# Altium PCB PCB1.PcbDoc
Units mil, origin at the board's own origin, x right, y up, seen from the top; angles counter-clockwise.
Board outline 4645.67 x 2874.02 mil, 2 copper layers (Top Layer, Bottom Layer); 106 components, 94 nets, 355 pads, 301 vias.
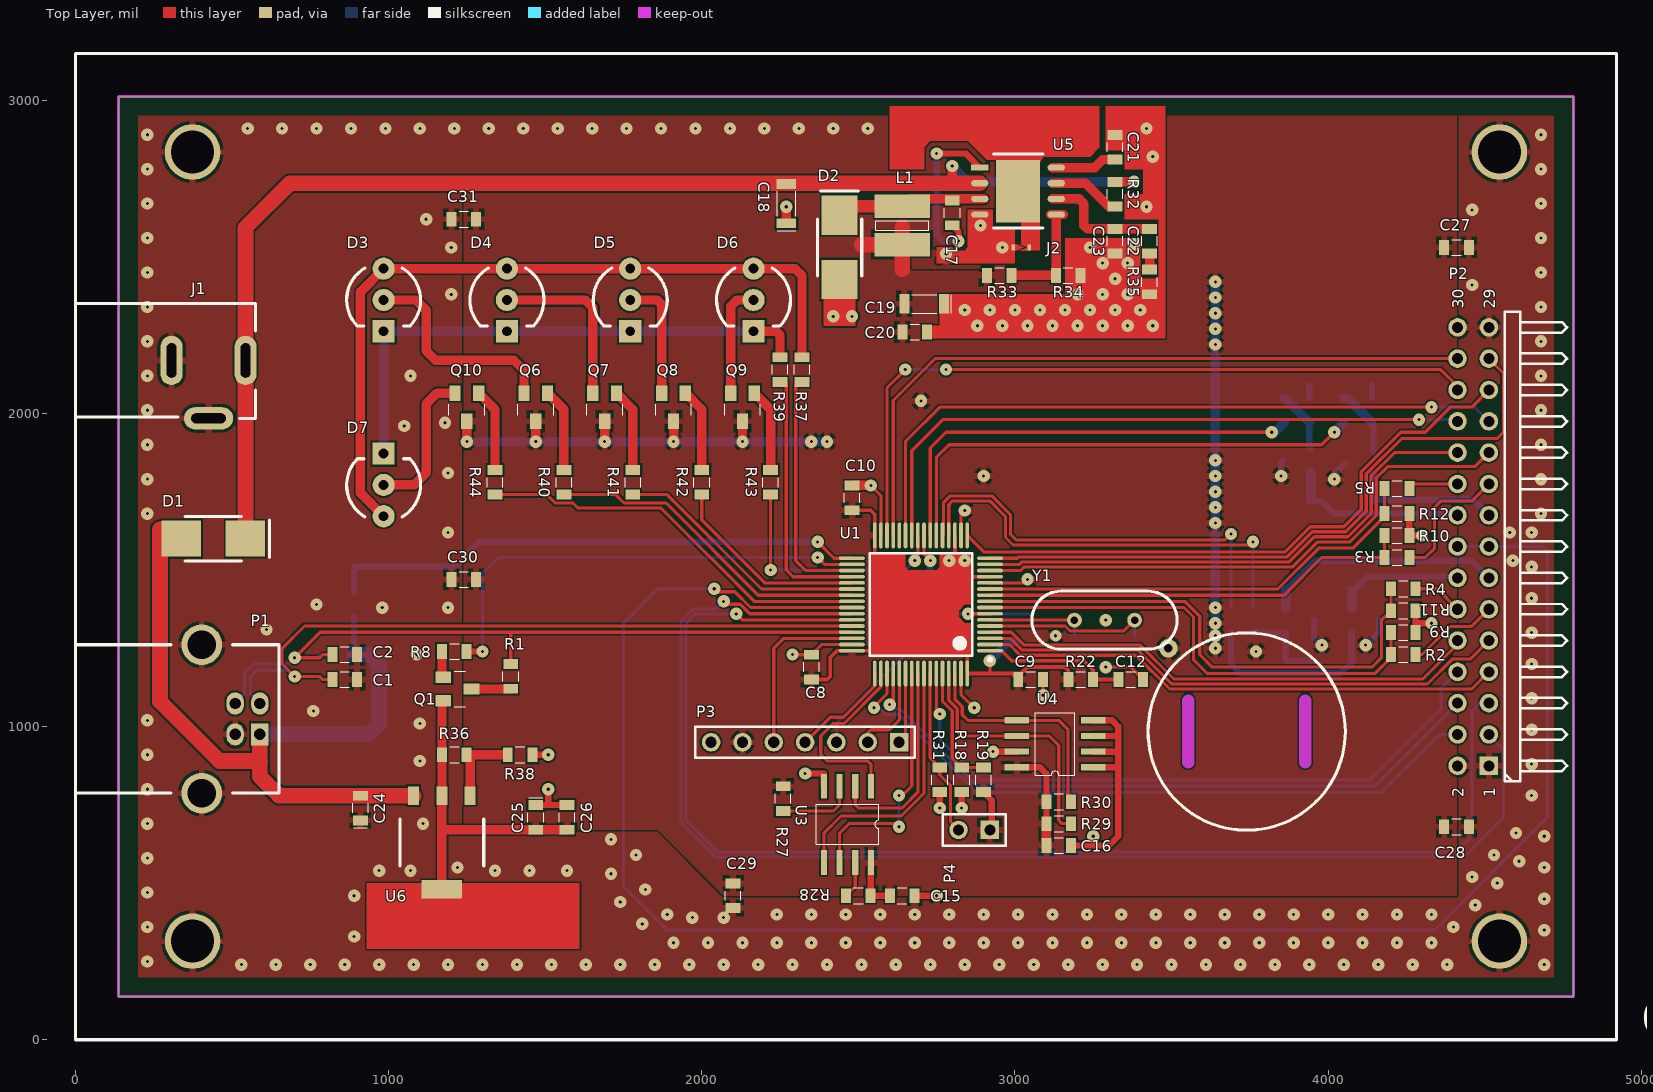
[diagram p0: Top Layer view]
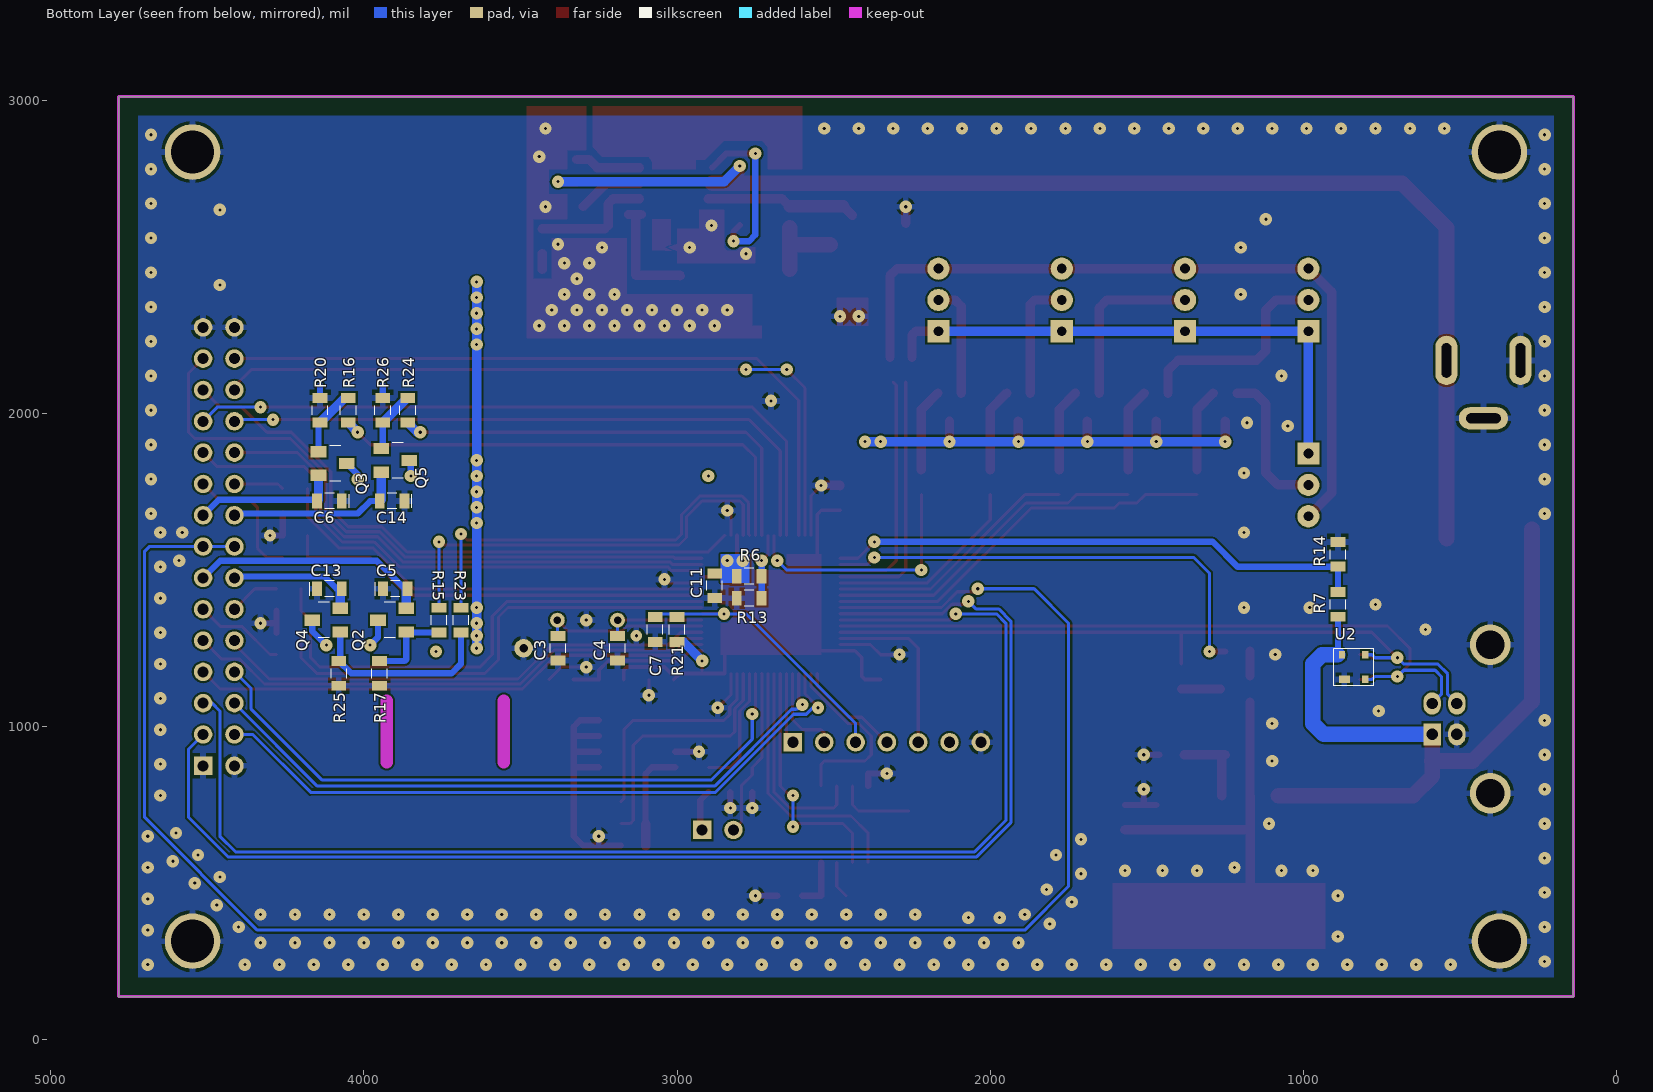
[diagram p1: Bottom Layer view, seen from below]

## Layer stack, top to bottom
Top Layer: signal copper 1.4
Dielectric: dielectric 12.6, FR-4, Dk 4.8
Bottom Layer: signal copper 1.4

## Board outline
137.8,137.8 4783.46,137.8 4783.46,3011.81 137.8,3011.81

## Design rules (kind name [scope] priority, off if disabled: settings)
Clearance [All] p1: gap=6
DiffPairsRouting DiffPair_DiffPairsRouting [InDifferentialPair ('USBD')] p1: maxlimit=10 minlimit=10 mostfreqgap=10 maxuncoupledlength=500
DiffPairsRouting [All] p2: maxlimit=10 minlimit=10 mostfreqgap=10 maxuncoupledlength=500
MatchedLengths DiffPair_MatchedLengths [InDifferentialPair ('USBD')] p1: tolerance=1000 checknetsindiffpair=TRUE checkdiffpairvsdiffpair=TRUE checkothers=TRUE
PlaneConnect [All] p1: planeconnectstyle=Relief reliefexpansion=20 reliefentries=4 reliefconductorwidth=20 reliefairgap=10
PolygonConnect [All] p1: connectstyle=Relief reliefconductorwidth=20 reliefentries=4 polygonreliefangle="90 Angle" airgapwidth=10
RoutingVias [All] p1: holewidth=28 width=50 viastyle="Through Hole" minholewidth=28 minwidth=50 maxholewidth=28 maxwidth=50
SolderMaskExpansion [All] p1: expansion=4
Width DiffPair_Width [InDifferentialPair('USBD')] p1: maxlimit=30 minlimit=6 preferedwidth=10
Width [All] p2: maxlimit=100 minlimit=6 preferedwidth=30
26 further rules are at their usual default settings.

## Classes and differential pairs
component class Sheet1: C1 C2 C3 C4 C5 C6 C7 C8 C9 C10 C11 C12 C13 C14 C15 C16 P1 P2 P3 P4 Q1 Q2 Q3 Q4 Q5 R1 R2 R3 R4 R5 R6 R7 R8 R9 R10 R11 R12 R13 R14 R15 R16 R17 R18 R19 R20 R21 R22 R23 R24 R25 R26 R27 R28 R29 R30 R31 U1 U2 U3 U4 Y1
component class Sheet2: C17 C18 C19 C20 C21 C22 C23 C24 C25 C26 C27 C28 C29 C30 C31 D1 D2 D3 D4 D5 D6 D7 J1 J2 L1 Q6 Q7 Q8 Q9 Q10 R32 R33 R34 R35 R36 R37 R38 R39 R40 R41 R42 R43 R44 U5 U6
differential pair USBD: +USBD_P -USBD_N

## Components (designator, comment, footprint, x,y, rotation, side; value= is the part's Value field where it differs from the comment)
C1 "Cap" 0805 860,1150 r180 top
C2 "Cap" 0805 860,1230 r180 top
C3 "Cap" 0805 3380,1250 r90 bottom
C4 "Cap" 0805 3190,1250 r270 bottom
C5 "Cap" 0805A 3900,1440 r0 bottom
C6 "Cap" 0805A 4110,1720 r180 bottom
C7 "Cap" 0805 3070,1310 r270 bottom
C8 "Cap" 0805 2350,1190 r270 top
C9 "Cap" 0805 3050,1150 r180 top
C10 "Cap" 0805 2480,1730 r270 top
C11 "Cap" 0805 2880,1450 r90 bottom
C12 "Cap" 0805 3370,1150 r180 top
C13 "Cap" 0805A 4110,1440 r0 bottom
C14 "Cap" 0805A 3910,1720 r180 bottom
C15 "Cap" 0805 2640,460 r180 top
C16 "CAP" 0805 3140,620 r180 top
C17 "Cap" 0805 2800,2640 r90 top
C18 "Cap" 1206A 2270,2670 r270 top
C19 "Cap" 1206A 2710,2350 r0 top
C20 "Cap" 0805 2680,2260 r180 top
C21 "Cap" 0805 3320,2850 r270 top
C22 "Cap" 0805 3430,2550 r90 top
C23 "Cap" 0805 3320,2550 r90 top
C24 "Cap" 0805A 910,740 r270 top
C25 "Cap" 0805A 1470,710 r90 top
C26 "Cap" 0805 1570,710 r270 top
C27 "Cap" 0805 4410,2530 r180 top
C28 "Cap" 0805 4410,680 r180 top
C29 "Cap" 0805 2100,460 r90 top
C30 "Cap" 0805 1240,1470 r0 top
C31 "Cap" 0805 1240,2620 r0 top
D1 "optional" SMA_DO-241AC 440,1600 r0 top
D2 "B130" SMA_DO-241AC 2440,2530 r90 top
D3 "LED" LED-D 984.25,2362.2 r90 top locked
D4 "LED" LED-D 1377.95,2362.2 r90 top locked
D5 "LED" LED-D 1771.65,2362.2 r90 top locked
D6 "LED" LED-D 2165.35,2362.2 r90 top locked
D7 "LED" LED-D 984.25,1771.65 r270 top locked
J1 "PowerSocket" SP_PWR 0,1988.19 r0 top locked
J2 "Jump" SP_JUMP 3020,2530 r0 top
L1 "Inductance" GD4520/4532 2640,2600 r270 top
P1 "USB" USB_B_FE 0,787.4 r0 top locked
P2 "Header 15X2H" HDR2X15H 4513.39,874.8 r90 top locked
P3 "Header 7" HDR1X7 2630,950 r180 top
P4 "Header 2" HDR1X2 2920,670 r180 top
Q1 "S8550" SOT-23 1220,1120 r270 top
Q2 "N-MOS" SOT-23 3910,1340 r90 bottom
Q3 "N-MOS" SOT-23 4100,1840 r270 bottom
Q4 "N-MOS" SOT-23 4120,1340 r90 bottom
Q5 "N-MOS" SOT-23 3900,1850 r270 bottom
Q6 "S8050" SOT-23 1470,2020 r180 top
Q7 "S8050" SOT-23 1690,2020 r180 top
Q8 "S8050" SOT-23 1910,2020 r180 top
Q9 "S8050" SOT-23 2130,2020 r180 top
Q10 "S8050" SOT-23 1250,2020 r180 top
R1 "Res" 0805 1390,1160 r90 top
R2 "Res" 0805 4240,1230 r0 top
R3 "Res" 0805 4220,1540 r0 top
R4 "Res" 0805 4240,1440 r0 top
R5 "Res" 0805 4220,1760 r0 top
R6 "Res" 0805 2770,1480 r0 bottom
R7 "Res" 0805 890,1390 r270 bottom
R8 "Res" 0805 1210,1240 r0 top
R9 "Res" 0805 4240,1300 r180 top
R10 "Res" 0805 4220,1610 r180 top
R11 "Res" 0805 4240,1370 r180 top
R12 "Res" 0805 4220,1680 r180 top
R13 "Res" 0805 2770,1410 r180 bottom
R14 "Res" 0805 890,1550 r270 bottom
R15 "Res" 0805 3760,1340 r270 bottom
R16 "Res" 0805 4050,2010 r270 bottom
R17 "Res" 0805 3950,1170 r90 bottom
R18 "Res" 0805 2830,830 r90 top
R19 "Res" 0805 2900,830 r270 top
R20 "Res" 0805 4140,2010 r90 bottom
R21 "Res" 0805 3000,1310 r90 bottom
R22 "Res" 0805 3210,1150 r0 top
R23 "Res" 0805 3690,1340 r270 bottom
R24 "Res" 0805 3860,2010 r270 bottom
R25 "Res" 0805 4080,1170 r90 bottom
R26 "Res" 0805 3940,2010 r90 bottom
R27 "Res" 0805 2260,770 r90 top
R28 "Res" 0805 2500,460 r0 top
R29 "Res" 0805 3140,690 r180 top
R30 "Res" 0805 3140,760 r180 top
R31 "Res" 0805 2760,830 r90 top
R32 "Res" 0805 3320,2700 r90 top
R33 "Res" 0805 2950,2440 r180 top
R34 "Res" 0805 3170,2440 r180 top
R35 "Res" 0805 3430,2420 r90 top
R36 "Res" 0805 1210,910 r180 top
R37 "Res" 0805 2320,2140 r90 top
R38 "Res" 0805 1420,910 r180 top
R39 "Res" 0805 2250,2140 r90 top
R40 "Res" 0805 1560,1780 r270 top
R41 "Res" 0805 1780,1780 r270 top
R42 "Res" 0805 2000,1780 r270 top
R43 "Res" 0805 2220,1780 r270 top
R44 "Res" 0805 1340,1780 r90 top
U1 "STM32F103RBT6" LQFP64_M 2700,1390 r180 top
U2 "PRTR5V0U2X" SOT143B 840,1190 r180 bottom
U3 "MX25L3205D" SOP-8 2540,810 r270 top
U4 "AT24Cxx" SOP-8 3250,870 r180 top
U5 "MP2307" SOIC8N 3010,2710 r0 top
U6 "ASM1117" SOT-223 1170,630 r180 top
Y1 "XTAL2" SP_XTAL 3190,1340 r0 top

## Footprints (in the part's own frame and the unit in brackets; to place one, negate y for a bottom-side part, rotate by r counter-clockwise, add the part's x,y. Pads: shape width x height; smd on the part's side, far side on the other; paste and mask are expansions set on the pad)
0805 [mm]
  rect 0.8x1.2 smd: 1(-1,0) 2(1,0)
  silkscreen extent -0.38,-0.64 0.38,0.64
0805A [mm]
  rect 0.8x1.2 smd: 1(-1,0) 2(1,0)
  silkscreen extent -0.38,-0.64 1.6,0.64
1206A [mm]
  rect 0.8x1.6 smd: 1(-1.6,0) 2(1.6,0)
  silkscreen extent -1.02,-0.75 2.2,0.75
GD4520/4532 [mm]
  rect 1.9x4.5 smd: 1(-1.55,0) 2(1.55,0)
  silkscreen extent -0.38,-2.16 0.38,2.16
HDR1X2 [mm] "Connector; Header; 2 Position"
  rect 1.5x1.5 hole 0.9: 1(0,0)
  round 1.5 hole 0.9: 2(2.54,0)
  silkscreen extent -1.27,-1.27 3.81,1.27
HDR1X7 [mm] "Connector; Header; 7 Position"
  rect 1.5x1.5 hole 0.9: 1(0,0)
  round 1.5 hole 0.9: 2(2.54,0) 3(5.08,0) 4(7.62,0) 5(10.16,0) 6(12.7,0) 7(15.24,0)
  silkscreen extent -1.27,-1.27 16.51,1.27
HDR2X15H [mm] "Connector; Header; 15x2 Position; Right Angle"
  rect 1.5x1.5 hole 0.9: 1(0,0)
  round 1.5 hole 0.9: 2(0,2.54) 3(2.54,0) 4(2.54,2.54) 5(5.08,0) 6(5.08,2.54) 7(7.62,0) 8(7.62,2.54) 9(10.16,0) 10(10.16,2.54) 11(12.7,0) 12(12.7,2.54) 13(15.24,0) 14(15.24,2.54) 15(17.78,0) 16(17.78,2.54) 17(20.32,0) 18(20.32,2.54) 19(22.86,0) 20(22.86,2.54) 21(25.4,0) 22(25.4,2.54) 23(27.94,0) 24(27.94,2.54) 25(30.48,0) 26(30.48,2.54) 27(33.02,0) 28(33.02,2.54) 29(35.56,0) 30(35.56,2.54)
  silkscreen extent -1.27,-6.35 36.83,-1.27
LED-D [mm]
  rect 1.8x1.8 hole 0.8: 1(-2.54,0)
  round 1.8 hole 0.8: 2(0,0) 3(2.54,0)
  silkscreen extent -2.12,-3 2.6,3
LQFP64_M [mm] "Thin QFP, 64-Leads, Body 10x10mm, Pitch 0.5mm, IPC Low Density"
  oval 2.1x0.3 smd: 1(-5.6,3.75) 2(-5.6,3.25) 3(-5.6,2.75) 4(-5.6,2.25) 5(-5.6,1.75) 6(-5.6,1.25) 7(-5.6,0.75) 8(-5.6,0.25) 9(-5.6,-0.25) 10(-5.6,-0.75) 11(-5.6,-1.25) 12(-5.6,-1.75) 13(-5.6,-2.25) 14(-5.6,-2.75) 15(-5.6,-3.25) 16(-5.6,-3.75) 33(5.6,-3.75) 34(5.6,-3.25) 35(5.6,-2.75) 36(5.6,-2.25) 37(5.6,-1.75) 38(5.6,-1.25) 39(5.6,-0.75) 40(5.6,-0.25) 41(5.6,0.25) 42(5.6,0.75) 43(5.6,1.25) 44(5.6,1.75) 45(5.6,2.25) 46(5.6,2.75) 47(5.6,3.25) 48(5.6,3.75)
  oval 0.3x2.1 smd: 17(-3.75,-5.6) 18(-3.25,-5.6) 19(-2.75,-5.6) 20(-2.25,-5.6) 21(-1.75,-5.6) 22(-1.25,-5.6) 23(-0.75,-5.6) 24(-0.25,-5.6) 25(0.25,-5.6) 26(0.75,-5.6) 27(1.25,-5.6) 28(1.75,-5.6) 29(2.25,-5.6) 30(2.75,-5.6) 31(3.25,-5.6) 32(3.75,-5.6) 49(3.75,5.6) 50(3.25,5.6) 51(2.75,5.6) 52(2.25,5.6) 53(1.75,5.6) 54(1.25,5.6) 55(0.75,5.6) 56(0.25,5.6) 57(-0.25,5.6) 58(-0.75,5.6) 59(-1.25,5.6) 60(-1.75,5.6) 61(-2.25,5.6) 62(-2.75,5.6) 63(-3.25,5.6) 64(-3.75,5.6)
  silkscreen extent -5.72,-4.15 4.15,4.57, body extent -5,-5 5,5, height 1.6
SMA_DO-241AC [mm]
  rect 3.2x2.92 smd: 1(-2.6,0) 2(2.6,0)
  silkscreen extent -2.3,-1.8 4.57,1.8
SOIC8N [mm]
  rect 1.4x0.508 smd: 1(-3.1,1.905)
  oval 1.4x0.508 smd: 2(-3.1,0.635) 3(-3.1,-0.635) 4(-3.1,-1.905) 5(3.1,-1.905) 6(3.1,-0.635) 7(3.1,0.635) 8(3.1,1.905)
  rect 3.55x5.07 smd: 9(0,0)
  silkscreen extent -2,-3 2,3
SOP-8 [mm]
  rect 2x0.5 smd: 1(0,0) 2(0,-1.27) 3(0,-2.54) 4(0,-3.81) 5(6.2,-3.81) 6(6.2,-2.54) 7(6.2,-1.27) 8(6.2,0)
  silkscreen extent 1.48,-4.44 4.72,0.64
SOT143B [mm]
  rect 0.9x0.6 smd: 1(-0.75,-1)
  rect 0.5x0.6 smd: 2(0.95,-1) 3(0.95,1) 4(-0.95,1)
  silkscreen extent -1.63,-1.5 1.63,1.5
SOT-23 [mm]
  rect 0.915x1.27 smd: 1(-0.958,-1.14) 2(0.958,-1.14) 3(0,1.14)
  silkscreen extent -1.45,-0.25 1.45,0.65
SOT-223 [mm]
  rect 0.9x1.5 smd: 1(-2.3,-3.8) 2(0,-3.8) 3(2.3,-3.8)
  rect 3.3x1.5 smd: 4(0,3.8)
  silkscreen extent -3.4,-1.9 3.4,1.9
SP_JUMP [mm]
  rect 0.3x0.5 smd: 1(-0.65,0) 2(0.65,0)
  Top Layer region: -0.127,0.25 0.508,0.25 0.508,-0.25 -0.127,-0.25 0.508,0
  Top Layer region: -0.381,0.25 -0.508,0.25 -0.508,-0.25 -0.381,-0.25 0.254,0
SP_PWR [mm]
  oval 1.8x4 hole 0.8 slot 2.8 at 90 deg: 1(13.8,4.6) 2(7.8,4.6)
  oval 4x1.8 hole 0.8 slot 2.8 at 0 deg: 3(10.8,-0.1)
  silkscreen extent 0,-0.1 14.6,9.2
SP_XTAL [mm]
  round 1.2 hole 0.6: 1(0,0) 2(4.88,0)
  silkscreen extent -3.45,-2.35 8.33,2.35
USB_B_FE [mm] "USB Female B Type Socket"
  rect 1.4x1.8 hole 0.92: 1(14.96,4.77)
  oval 1.4x1.8 hole 0.92: 2(14.96,7.27) 3(12.96,7.27) 4(12.96,4.77)
  round 3.3 hole 2.3: 5(10.25,12.04) 6(10.25,0)
  silkscreen extent 0,0 16.5,12.04

## Part data
C5 C6 C13 C14 C18 C19 C24 C25: library part "Cap Pol"
C16: library part Cap
D1 D2: library part "Diode 2"
D3 D4 D5 D6 D7: library part LED2
J1: library part PWR, "Power Socket"
P1: library part "USB Socket"
P2: "Header, 15-Pin, Dual row, Right Angle"
P3: "Header, 7-Pin"
P4: "Header, 2-Pin"
U1: "STM32 ARM-based 32-bit MCU with 128 Kbytes Flash, 64-pin LQFP, Industrial Temperature"
U3: library part MX25L1605D/MX25L3205D/MX25L6405D

## Free pads (board coordinates)
  round 59.06 hole 27.56: 0(3490,1250)
  round 177.17 hole 137.8: 7(374.02,2834.65) 8(4547.24,2834.65) 9(374.02,314.96) 10(4547.24,314.96)

## Via types
v1: diameter 39.37, hole 10, Top Layer to Bottom Layer, 299 vias
v2: diameter 36, hole 10, Top Layer to Bottom Layer, 1 vias
v3: diameter 39.37, hole 10, Top Layer to Bottom Layer, tented top, 1 vias

## Nets (pads, with @x,y where several pads share a name; then routed paths per layer and width w, separated by ;. In a path a pad name is that pad's centre, name@x,y a point inside that pad or via, vN(x,y) a via of type N, cw(c..) or ccw(c..) an arc to the next point about the centre after c; other vN are vias at no path point)
ADC_CH1: R2.1 R9.2 U1.8 | length 1548
  Top Layer w10: U1.8 3539.84,1380.16 3570,1350 3570,1213.37 3613.37,1170 4150.63,1170 4200.63,1220 R9.2
ADC_CH2: R3.1 R10.2 U1.10 | length 1380.1
  Top Layer w10: U1.10 3859.53,1419.53 3980,1540 R3.1 R10.2
ADC_CH3: R5.1 R12.2 U1.11 | length 1445
  Top Layer w10: U1.11 3839.21,1439.21 3970,1570 4079.26,1570 4180.63,1671.37 R12.2 R5.1
ADC_CH4: R4.1 R11.2 U1.9 | length 1653.4
  Top Layer w10: U1.9 3542.78,1399.84 3590,1352.63 3590,1230 3630,1190 4140,1190 4170,1220 4170,1339.37 R11.2 R4.1
ADC_VCC: R6.1 R13.2 U1.24 | length 209.1
  Top Layer w10: U1.24 2709.84,1550.16 v1(2730,1530)
  Bottom Layer w20: v1(2730,1530) 2730,1410.63 R13.2
CH1_ADC: P2.11 R2.2 | length 294
  Top Layer w10: R2.2 4300,1230 4390,1320 4458.58,1320 P2.11
CH1_PWR: R15.1 U1.20 | length 1382.1
  Top Layer w10: U1.20 2788.58,1708.58 2800.69,1720.69 2919.31,1720.69 2970,1670 2970,1604 2994,1580 v1@3760,1580
  Bottom Layer w10: R15.1 v1(3760,1590)
CH1_RST: P2.7 U1.2 | length 1674.5
  Top Layer w10: U1.2 2982.7,1262.05 3016.75,1228 3386.3,1228 3494.3,1120 4458.58,1120 P2.7
CH1_RX: P2.5 U1.43 | length 4215.7
  Top Layer w10: v1(2110,1360) 2129.21,1340.79 U1.43
  Bottom Layer w10: v1(2110,1360) 1980,1360 1950,1330 1950,700 2050,600 4410,600 4460,650 4460,1050 4484.8,1074.8 P2.5
CH1_SIG: P2.9 U1.3 | length 1710.8
  Top Layer w10: U1.3 2985.64,1281.73 3023.37,1244 3392.92,1244 3500.92,1136 4317.27,1136 4396.6,1215.33 4453.91,1215.33 P2.9
CH1_TX: P2.3 U1.42 | length 4239
  Top Layer w10: v1(2070,1400) 2079.31,1390.69 2122.71,1390.69 2152.92,1360.47 U1.42
  Bottom Layer w10: v1(2070,1400) 2046,1376 1973.37,1376 1934,1336.63 1934,693.37 2043.37,584 4434,584 4560,710 4560,928.19 P2.3
CH1_VCC: C5.1 P2.13 Q2.2 | length 767.5
  Bottom Layer w20: C5.1@3865.12,1435.51 3958.88,1529.28 4458.91,1529.28 P2.13
  Bottom Layer w30: Q2.2 C5.1@3865.12,1435.51
CH2_ADC: P2.19 R3.2 | length 427.4
  Top Layer w10: R3.2 4310,1540 4340,1570 4340,1700 4360,1720 4458.58,1720 P2.19
CH2_PWR: R16.2 U1.22 | length 1596
  Top Layer w10: U1.22 2749.21,1859.21 2790,1900 3980,1900 v1(4020,1940)
  Bottom Layer w10: v1(4020,1940) v1@4020,1940.63
  Bottom Layer w30: v1@4020,1940.63 R16.2
CH2_RST: P2.23 U1.27 | length 2226.9
  Top Layer w10: U1.27 2650.79,1910.79 2760,2020 v1(4330,2020)
  Bottom Layer w10: v1(4330,2020) 4468.19,2020 P2.23
CH2_RX: P2.25 U1.17 | length 1971.8
  Top Layer w10: U1.17 2900.11,1558 3862.75,1558 3942.75,1638 4050.12,1638 4105.88,1693.76 4105.88,1813.76 4232.12,1940 4310,1940 4390,2020 4458.58,2020 P2.25
CH2_SIG: P2.21 U1.14 | length 1819.2
  Top Layer w10: U1.14 3018.27,1498.27 3030,1510 3887.37,1510 3967.37,1590 4070,1590 4153.88,1673.88 4153.88,1793.88 4190,1830 4468.58,1830 P2.21
CH2_TX: P2.27 U1.16 | length 2130.6
  Top Layer w10: U1.16 3007.64,1537.64 3012,1542 3869.37,1542 3949.37,1622 4056.75,1622 4121.88,1687.14 4121.88,1807.14 4234.75,1920 4540,1920 4560,1940 4560,2128.19 P2.27
CH2_VCC: C6.1 P2.17 Q3.2 | length 466.9
  Bottom Layer w20: C6.1@4144.88,1724.49 4463.7,1724.49 P2.17
  Bottom Layer w30: C6.1@4144.88,1724.49 Q3.2
CH3_ADC: P2.20 R5.2 | length 160.1
  Top Layer w10: R5.2 4274.17,1774.8 P2.20
CH3_PWR: R24.2 U1.23 | length 1443.1
  Top Layer w10: U1.23 2729.53,1889.53 2780,1940 v1(3820,1940)
  Bottom Layer w30: v1(3820,1940) 3829.37,1940 R24.2
CH3_RST: P2.24 U1.26 | length 2056.3
  Top Layer w10: U1.26 2670.47,1880.47 2770,1980 v1(4290,1980)
  Bottom Layer w10: v1(4290,1980) 4408.19,1980 P2.24
CH3_RX: P2.26 U1.30 | length 2351
  Top Layer w10: U1.30 2591.73,2081.73 v1(2650,2140) ; v1(2780,2140) 4360,2140 4413.39,2086.61 P2.26
  Bottom Layer w10: v1(2650,2140) v1(2780,2140)
CH3_SIG: P2.22 U1.15 | length 1711
  Top Layer w10: U1.15 3015.33,1517.95 3023.37,1526 3876,1526 3956,1606 4063.37,1606 4137.88,1680.51 4137.88,1800.51 4212.18,1874.8 P2.22
CH3_TX: P2.28 U1.29 | length 2288.2
  Top Layer w10: U1.29 2611.42,2041.42 2744.8,2174.8 P2.28
CH3_VCC: C14.1 P2.18 Q5.2 | length 576.9
  Bottom Layer w20: C14.1@3944.88,1724.49 C14.1 3979.53,1720 4019.16,1680.38 4407.81,1680.38 P2.18
  Bottom Layer w30: C14.1@3944.88,1724.49 Q5.2
CH4_ADC: P2.12 R4.2 | length 161
  Top Layer w10: R4.2 4348.19,1440 P2.12
CH4_PWR: R23.1 U1.21 | length 1371
  Top Layer w10: U1.21 2771.68,1613.25 2771.68,1714.3 2794.06,1736.69 2925.94,1736.69 2986,1676.63 2986,1614 3004,1596 3671,1596 v1(3690,1615)
  Bottom Layer w10: R23.1 v1(3690,1615)
CH4_RST: P2.8 U1.59 | length 2102.5
  Top Layer w10: U1.59 2749.21,1050.79 v1(2760,1040)
  Bottom Layer w10: v1(2760,1040) 2760,960 2890,830 4134.3,830 4360,1055.7 4360,1121.42 P2.8
CH4_RX: P2.6 U1.52 | length 2135
  Top Layer w10: v1(2600,1070) 2611.42,1081.42 U1.52
  Bottom Layer w10: v1(2600,1070) 2614,1056 2620.02,1056 2620.71,1055.31 2634.69,1055.31 2880,810 4148.58,810 P2.6
CH4_SIG: P2.10 U1.4 | length 1612.4
  Top Layer w10: U1.4 2988.58,1301.42 3030,1260 3400,1260 3508,1152 4302,1152 4413.39,1263.39 P2.10
CH4_TX: P2.4 U1.51 | length 2179.6
  Top Layer w10: v1(2550,1060) 2550,1063.4 2591.73,1105.13 U1.51
  Bottom Layer w10: v1(2550,1060) 2566.6,1060 2587.29,1039.31 2612.71,1039.31 ; 2613.4,1040 2612.71,1039.31 ; P2.4 4354.41,974.8 4169.6,790 2877.37,790 2628.06,1039.31 2612.71,1039.31
CH4_VCC: C13.1 P2.14 Q4.2 | length 419
  Bottom Layer w20: C13.1 4087.37,1440 4126.99,1479.62 4408.57,1479.62 P2.14
  Bottom Layer w30: Q4.2 C13.1@4075.12,1435.51
CLK_OUT: P2.15 P2.16 U1.41 | length 5939.7
  Top Layer w10: v1(2040,1440) 2049.31,1430.69 2105.34,1430.69 2155.87,1380.16 U1.41
  Bottom Layer w10: v1(2040,1440) 1860,1440 1750,1330 1750,490 1890,350 4340,350 4700,710 4700,1560 4685.2,1574.8 P2.16
GND: C1.1 C2.1 C3.1 C4.2 C5.2 C6.2 C7.2 C8.1 C9.1 C10.1 C11.1 C12.1 C13.2 C14.2 C15.1 C16.1 C18.2 C19.2 C20.1 C21.1 C23.1 C24.2 C25.2 C26.1 C27.1 C28.1 C29.1 C30.1 C31.1 D2.1 J1.2 J1.3 J2.1 P1.4 P1.5 P1.6 P2.1 P2.2 P2.29 P2.30 P3.7 pad.0 pad.7 pad.8 pad.9 pad.10 R9.1 R10.1 R11.1 R12.1 R13.1 R14.1 R17.1 R18.1 R20.2 R25.1 R26.2 R31.1 R34.1 R35.1 R38.1 U1.12 U1.18 U1.31 U1.47 U1.63 U2.1 U3.4 U4.1 U4.2 U4.3 U4.4 U4.7 U5.4 | length 2737
  Top Layer w10: v1(2290,1230) 2290.63,1229.37 C8.1 2382.68,1262.05 U1.47 ; v1(2540,1770) 2572.05,1737.95 U1.31 ; U1.63 2827.95,1102.05 v1(2870,1060) ; U1.18 v1@2827.95,1687.95 ; U1.12 3028.9,1458.9 v1(3040,1470) ; C9.1 3089.37,1100.63 v1(3090,1100) ; v1(3290,1190) 3369.37,1190 C12.1
  Top Layer w20: R38.1 v1(1510,910) ; C25.2 1510,749.37 ; v1(1510,800) 1510,749.37 ; C26.1 1510,749.37 ; v1(2330,850) 2390,850 U3.4 ; C15.1 v1(2750,460) ; v1(2760,740) R31.1 ; v1(2830,740) R18.1 ; v1(2930,920) U4.7 ; C16.1 3250,620 ; v1(3250,650) 3250,620 ; U4.1 3330,870 ; U4.2 3330,920 ; U4.3 3330,970 ; U4.4 3310,1020 3330,1000 3330,970 ; R12.1 R10.1 v1(4300,1610) ; R9.1 4279.37,1330 ; R11.1 4279.37,1330 ; v1(4330,1330) 4279.37,1330 ; 3250,620 3300,620 3330,650 3330,870 ; 3330,870 3330,920 ; 3330,920 3330,970
  Top Layer w30: C18.2 v1(2270,2660) ; C10.1 2480.63,1770 v1(2540,1770)
  Bottom Layer w20: R26.2 3940,2090 ; R20.2 4140,2090
  other v1: 530,240 640,240 750,240 860,240 970,240 1080,240 1190,240 1300,240 1410,240 1520,240 1630,240 1740,240 1850,240 1960,240 2070,240 2180,240 2290,240 2400,240 2510,240 2620,240 2730,240 2840,240 2950,240 3060,240 3170,240 3280,240 3390,240 3500,240 3610,240 3720,240 3830,240 3940,240 4050,240 4160,240 4270,240 4380,240 4690,240 230,250 1910,310 2020,310 2130,310 2240,310 2350,310 2460,310 2570,310 2680,310 2790,310 2900,310 3010,310 3120,310 3230,310 3340,310 3450,310 3560,310 3670,310 3780,310 3890,310 4000,310 4110,310 4220,310 4330,310 890,330 4690,350 230,360 4400,360 1810,370 1970,390 2070,390 1890,400 2240,400 2350,400 2460,400 2570,400 2680,400 2790,400 2900,400 3010,400 3120,400 3230,400 3340,400 3450,400 3560,400 3670,400 3780,400 3890,400 4000,400 4110,400 4220,400 4330,400 4470,430 1740,440 4690,450 890,460 230,470 1820,480 4540,500 4460,520 1710,530 970,540 1070,540 1340,540 1450,540 1570,540 1220,550 4690,550 4610,570 230,580 1790,590 4530,590 1710,640 4690,650 4600,660 230,690 1110,690 4650,780 230,800 4650,880 1100,890 230,910 4650,990 1100,1010 230,1020 760,1050 4650,1090 4650,1200 1090,1230 4650,1300 610,1310 3290,1340 980,1380 1190,1380 770,1390 4650,1410 4650,1510 4590,1530 1190,1620 4580,1620 4650,1620 230,1680 4680,1680 2840,1690 230,1790 4680,1790 1190,1810 230,1900 4680,1900 1050,1960 1180,1970 230,2010 4680,2010 2700,2040 230,2120 1070,2120 4680,2120 230,2230 4680,2230 2880,2280 2960,2280 3040,2280 3120,2280 3200,2280 3280,2280 3360,2280 3440,2280 2420,2310 2480,2310 2840,2330 2920,2330 3000,2330 3080,2330 3160,2330 3240,2330 3320,2330 3400,2330 230,2340 4680,2340 1200,2380 3200,2380 3280,2380 3360,2380 4460,2410 3320,2430 230,2450 4680,2450 3280,2480 3360,2480 2780,2510 1200,2530 2960,2530 3240,2530 3380,2540 230,2560 4680,2560 2890,2600 1120,2620 4460,2650 3420,2660 230,2670 4680,2670 230,2780 4680,2780 3440,2820 230,2890 4680,2890 550,2910 660,2910 770,2910 880,2910 990,2910 1100,2910 1210,2910 1320,2910 1430,2910 1540,2910 1650,2910 1760,2910 1870,2910 1980,2910 2090,2910 2200,2910 2310,2910 2420,2910 2530,2910 3420,2910
  other v2: 3130,1290
I2C1_SCL: R29.1 U1.61 U4.6 | length 822.6
  Top Layer w10: U1.61 2788.58,1084.04 2816,1056.63 2816,984 2830,970 U4.6 3110,970 3140,940 3140,700 3150,690 R29.1
I2C1_SDA: R30.1 U1.62 U4.5 | length 733.1
  Top Layer w10: U1.62 2808.27,1086.99 2832,1063.25 2832,1038 2850,1020 U4.5 3140,1020 3170,990 3170,769.37 R30.1
KEY_START: P4.2 R31.2 U1.58 | length 537.2
  Top Layer w10: U1.58 2729.31,1169.31 2729.31,900.06 R31.2 2760,845.56 2794.62,810.93 2794.62,695.38 P4.2
LED_CH1: R40.2 U1.39 | length 1052.5
  Top Layer w10: R40.2 1725.07,1740.63 1751.82,1713.88 1886.12,1713.88 2180.47,1419.53 U1.39
LED_CH2: R41.2 U1.38 | length 824.4
  Top Layer w10: R41.2 1889.37,1740.63 2190.79,1439.21 U1.38
LED_CH3: R42.2 U1.37 | length 643.5
  Top Layer w10: R42.2 2000,1660 2201.1,1458.9 U1.37
LED_CH4: R43.2 U1.25 | length 797.7
  Top Layer w10: v1(2220,1500) R43.2 ; v1(2680,1530) 2690.16,1540.16 U1.25
  Bottom Layer w10: v1(2220,1500) 2650,1500 v1(2680,1530)
LED_G: R37.1 U1.35 | length 766.8
  Top Layer w10: R37.1@2310,2100 2300,2090 2300,1530 2331.73,1498.27 U1.35
LED_R: R39.1 U1.36 | length 818.4
  Top Layer w10: R39.1@2270,2100 2270,1500 2291.42,1478.58 U1.36
LED_USB: R44.1 U1.40 | length 1280.7
  Top Layer w10: R44.1 1505.07,1740.63 1531.82,1713.88 1588.18,1713.88 1604.18,1697.88 1869.49,1697.88 2167.53,1399.84 U1.40
NetC3_2: C3.2 U1.5 Y1.2 | length 541
  Top Layer w10: U1.5 3159.93,1321.1 3175.66,1305.38 3347.5,1305.38 Y1.2
  Bottom Layer w10: C3.2@3382.13,1291.5 Y1.2 Y1.2@3382.13,1350
NetC4_1: C4.1 U1.6 Y1.1 | length 343.5
  Top Layer w10: U1.6 Y1.1@3180.79,1340.79 ; Y1.1 3189.21,1340.79 Y1.1@3180.79,1340.79 ; Y1.1@3190,1350 Y1.1@3180.79,1340.79
  Bottom Layer w10: C4.1 Y1.1 Y1.1@3190,1350
NetC12_2: C12.2 R22.2 U1.1 | length 466.4
  Top Layer w12: U1.1 2957.64,1242.36 2990,1210 3220,1210 3249.37,1180.63 R22.2 C12.2
NetC17_1: C17.1 U5.1 | length 553.8
  Top Layer w20: v1(2750,2830) 2842.95,2830 U5.1 ; C17.1 2820,2580.63 v1(2820,2550)
  Bottom Layer w20: v1(2750,2830) 2750,2570 2770,2550 v1(2820,2550)
NetC17_2: C17.2 D2.2 L1.1 U5.3 | length 481.8
  Top Layer w30: D2.2 D2.2@2468.66,2661.02 ; L1.1 2663.98,2685 U5.3 U5.3@2900,2685
  Top Layer w40: D2.2@2468.66,2661.02 L1.1
NetC18_1: C18.1 D1.2 J1.1 R32.2 U5.2 | length 4113
  Top Layer w30: 2800,2735 v1(2800,2790) ; R32.2 3320.63,2740 v1(3380,2740)
  Top Layer w50: D1.2 543.31,1600.94 J1.1 543.31,2593.31 685,2735 2800,2735 U5.2
  Bottom Layer w30: v1(2800,2790) 2850,2740 v1(3380,2740)
NetC21_2: C21.2 U5.8 | length 210.6
  Top Layer w30: U5.8@3120,2785 3255,2785 3280.63,2810.63 C21.2
NetC22_1: C22.1 R35.2 | length 51.3
  Top Layer w30: R35.2 C22.1
NetC22_2: C22.2 C23.2 U5.6 | length 390.6
  Top Layer w30: U5.6@3120,2685 3205,2685 3220,2670 3220,2600 3230.63,2589.37 C23.2 C22.2
NetD3_1: D3.1 D4.1 D5.1 D6.1 D7.1 R39.2 | length 1732
  Top Layer w30: D6.1 2237.8,2262.2 2250,2250 R39.2
  Bottom Layer w30: D7.1 D3.1 D4.1 D5.1 D6.1
NetD3_2: D3.2 Q6.2 | length 690
  Top Layer w30: D3.2 1087.8,2362.2 1120,2330 1120,2200 1150,2170 1400,2170 1432.3,2137.7 Q6.2
NetD3_3: D3.3 D4.3 D5.3 D6.3 D7.3 R37.2 | length 2457.6
  Top Layer w30: D7.3 910,1745.91 910,2387.95 D3.3 D4.3 D5.3 D6.3 2297.8,2462.2 2320,2440 R37.2
NetD4_2: D4.2 Q7.2 | length 557.3
  Top Layer w30: D4.2 1627.8,2362.2 1652.3,2337.7 Q7.2
NetD5_2: D5.2 Q8.2 | length 389.5
  Top Layer w30: D5.2 1857.8,2362.2 1872.3,2347.7 Q8.2
NetD6_2: D6.2 Q9.2 | length 358.7
  Top Layer w30: Q9.2 2092.3,2342.3 2112.2,2362.2 D6.2
NetD7_2: D7.2 Q10.2 | length 478.4
  Top Layer w30: D7.2 1081.65,1771.65 1120,1810 1120,2030 1154.88,2064.88 Q10.2
NetJ2_2: J2.2 U5.9
NetQ1_1: Q1.1 R8.1 | length 77.8
  Top Layer w30: Q1.1@1170.63,1162.19 R8.1
NetQ1_3: Q1.3 R1.1 | length 124.5
  Top Layer w30: Q1.3 R1.1@1389.37,1120
NetQ2_1: Q2.1 R15.2 R17.2 | length 280.8
  Bottom Layer w20: R15.2 3863.44,1300.63 Q2.1 3865.12,1214.25 3870,1209.37 R17.2
NetQ3_1: Q3.1 R16.1 R20.1 | length 217.6
  Bottom Layer w20: R20.1 4144.88,1965.75 Q3.1
  Bottom Layer w30: R16.1 4061.26,2049.37 R20.1
NetQ4_1: Q4.1 R23.2 R25.2 | length 614.3
  Bottom Layer w20: R23.2 3690,1200 3720,1170 4040.63,1170 R25.2 4075.12,1214.25 Q4.1
NetQ5_1: Q5.1 R24.1 R26.1 | length 197.6
  Bottom Layer w20: R26.1 3940,1892.58 Q5.1
  Bottom Layer w30: R24.1 3861.26,2049.37 R26.1
NetQ6_1: Q6.1 R40.1 | length 267.2
  Top Layer w30: Q6.1 1560,2012.58 R40.1
NetQ7_1: Q7.1 R41.1 | length 267.2
  Top Layer w30: Q7.1 1780,2012.58 R41.1
NetQ8_1: Q8.1 R42.1 | length 267.2
  Top Layer w30: Q8.1 2000,2012.58 R42.1
NetQ9_1: Q9.1 R43.1 | length 266.5
  Top Layer w30: Q9.1 2220,2012.58 R43.1@2220,1820
NetQ10_1: Q10.1 R44.2 | length 267.2
  Top Layer w30: Q10.1 1340,2012.58 R44.2
NetR18_2: R18.2 R19.1 U1.60 | length 395.5
  Top Layer w10: U1.60 2768.9,1081.1 2800,1050 2800,899.37 R18.2 R19.1
NetR27_1: R27.1 U3.3 | length 248
  Top Layer w10: R27.1 2420.63,730.63 2440,750 U3.3
NetR28_1: R28.1 U3.7 | length 118.1
  Top Layer w10: R28.1 2490,489.37 U3.7
NetR32_1: R32.1 U5.7 | length 210.2
  Top Layer w30: U5.7@3120,2735 3225,2735 R32.1@3299.37,2660.63
NetR33_1: R33.1 R34.2 U5.5 | length 376.8
  Top Layer w30: R33.1 2990.79,2441.42 3132.05,2441.42 U5.5 ; U5.5@3115,2635 U5.5 ; U5.5@3155,2635 U5.5
NetR36_1: R36.1 R38.2 U6.1 | length 250.5
  Top Layer w30: R36.1 R38.2 ; U6.1 R36.1@1260.55,898.82
RST: C7.1 P3.3 R21.2 U1.7 | length 904.3
  Top Layer w10: v1@2850.47,1360.47 U1.7
  Bottom Layer w10: P3.3 2430,1010 2780,1360 v1(2850,1360) C7.1@3059.37,1360
SPI3_MISO: U1.56 U3.2 | length 664.4
  Top Layer w10: U3.2 2490,750 2500,740 2640,740 2690.16,790.16 U1.56
SPI3_MOSI: U1.57 U3.5 | length 848.9
  Top Layer w10: U3.5 2390,660 2444.63,714.63 2637.26,714.63 2709.84,787.22 U1.57
SPI3_NSS: U1.50 U3.1 | length 602.2
  Top Layer w10: U3.1 2540,880 2530,890 2400,890 2380,910 2380,970 2420,1010 2455.31,1010 2572.05,1126.73 U1.50
SPI3_SCK: U1.55 U3.6 | length 812.9
  Top Layer w10: U3.6 2440,660 2470,690 v1@2630,690 ; v1@2630,770 2670.53,810.53 U1.55 U1.55
  Bottom Layer w10: v1(2630,680) v1(2630,780)
SWCLK: P3.4 U1.49 | length 336.6
  Top Layer w10: P3.4 2410,1030 2452.69,1030 2552.36,1129.68 U1.49
SWDIO: P3.5 U1.46 | length 562.7
  Top Layer w10: P3.5 2230,1250 2261.73,1281.73 U1.46
UART5_RX: P3.1 U1.54 | length 228.1
  Top Layer w10: P3.1 2650.79,970.79 U1.54
UART5_TX: P3.2 U1.53 | length 296.6
  Top Layer w10: P3.2 2530,980 2540,990 2595.39,990 2595.92,990.53 2600.53,990.53 2631.1,1021.1 U1.53
USB_CHECK: R7.1 R14.2 U1.33 | length 1725.4
  Top Layer w10: v1(2370,1590) 2422.36,1537.64 U1.33
  Bottom Layer w20: R7.1 R14.2 1210.63,1510.63 1290,1590 v1(2370,1590)
USB_EN: R8.2 U1.34 | length 1510
  Top Layer w10: v1(2370,1540) 2392.05,1517.95 U1.34
  Top Layer w20: R8.2 v1(1300,1240)
  Bottom Layer w10: v1(1300,1240) 1300,1490 1350,1540 v1(2370,1540)
USBD_N: C1.2 P1.2 U1.44 U2.2 | length 2442.4
  Top Layer w10: C1.2 790.79,1150 780.79,1160 v1(700,1160) 660,1200 660,1250 731.42,1321.42 U1.44@2479.53,1321.42
  Bottom Layer w10: P1.2 559.61,1102.99 559.61,1160 579.61,1180 680,1180 v1(700,1160) 771.42,1160 780.79,1150.63 U2.2
USBD_P: C2.2 P1.3 R1.2 U1.45 U2.3 | length 2435.2
  Top Layer w10: C2.2 790.79,1230 780.79,1220 v1(700,1220) 781.42,1301.42 1390,1301.42 ; R1.2 1390,1301.42 ; U1.45 1390,1301.42
  Bottom Layer w10: P1.3 539.61,1102.99 539.61,1168.28 571.32,1200 680,1200 v1(700,1220) 771.42,1220 780.79,1229.37 U2.3
V3.3: C8.2 C9.2 C10.2 C11.2 C15.2 C16.2 C19.1 C20.2 C25.1 C26.2 C27.2 C28.2 C29.2 C30.2 C31.2 L1.2 P3.6 P4.1 Q1.2 Q2.3 Q3.3 Q4.3 Q5.3 Q6.3 Q7.3 Q8.3 Q9.3 Q10.3 R6.2 R19.2 R21.1 R22.1 R27.2 R28.2 R29.2 R30.2 R33.2 R36.2 U1.13 U1.19 U1.32 U1.48 U1.64 U3.8 U4.8 U6.2 U6.4 | length 6041.9
  Top Layer w10: 2920,1169.53 v3(2920,1210)
  Top Layer w12: C8.2 2400.63,1150.63 2410,1160 2410,1220 2432.36,1242.36 U1.48 2547.64,1242.36 ; C10.2 2539.37,1690.63 2552.36,1677.64 U1.32 2552.36,1542.36 ; 2808.27,1551.73 U1.19 ; 2847.64,1237.64 U1.64 2920,1169.53 2991.1,1169.53 ; 2851.42,1478.58 U1.13 ; C9.2 2991.1,1169.53 ; R22.1 3170.63,1179.37 3160,1190 3040,1190 3019.53,1169.53 2991.1,1169.53
  Top Layer w20: R28.2 C15.2 ; R28.2@2540,460.63 U3.8 ; R19.2 2925.69,764.94 P4.1@2925.69,675.69 ; U4.8 3080,870 3100.63,849.37 R30.2 R29.2
  Top Layer w30: U6.4 U6.2 ; 1170.63,670.63 C26.2 ; U6.2@1170.63,780.24 R36.2 Q1.2@1170.63,1077.81 ; v1(1250,1910) Q10.3 ; v1(1470,1910) Q6.3 ; v1(1690,1910) Q7.3 ; v1(1910,1910) Q8.3 ; v1(2130,1910) Q9.3 ; C16.2 R29.2
  Top Layer w50: 2511.02,2538.98 L1.2 ; 2640,2460 L1.2 ; 2640,2592.62 L1.2
  Bottom Layer w20: v1(3850,1800) 3850,1844.88 Q5.3 ; Q2.3 3954.88,1285.12 v1(3980,1260) ; v1(4020,1790) 4020,1804.88 Q3.3 ; v1(4120,1260) 4164.88,1304.88 Q4.3
  Bottom Layer w30: v1(1250,1910) v1(1470,1910) v1(1690,1910) v1(1910,1910) v1(2130,1910) v1(2400,1910) ; v3(2920,1210) 2980.63,1270.63 R21.1 ; v1(3640,1250) v1@3640,2410
  other v1: 3770,1240 3640,1290 3640,1330 3640,1380 2790,1530 2840,1530 3640,1650 3640,1700 3640,1750 2900,1800 3640,1800 3640,1850 2350,1910 3640,2220 3640,2270 3640,2320 3640,2370 3640,2420
VBUS: C24.1 D1.1 P1.1 R7.2 U2.4 U6.3 | length 2397.7
  Top Layer w50: 270,1630 270,1080 460,890 590,890 ; P1.1 588.98,841.02 650.39,779.61 U6.3
  Bottom Layer w20: 890,1229.37 R7.2
  Bottom Layer w50: P1.1 935.2,975.2 970,1010 970,1200 940.63,1229.37 890,1229.37
pads on no net: U1.28

## Polygon pours and split planes (outlines as drawn)
V3.3 on Top Layer "Top Layer-No Net" (solid, remove dead copper, pour order 45): 1240,2735 1240,2580 1240,670.63 1240.63,670 1860,670 2050,480 2070,460 2120,460 4410,460 4410,620 4410,2950 4250,2950 2610,2950 2610,2735
GND on Top Layer "Top Layer-No Net" (solid, remove dead copper, pour order 51): 200,2950 200,200 4720,200 4720,250 4720,2950
GND on Bottom Layer "Top Layer-No Net" (solid, remove dead copper, pour order 53): 200,2950 4720,2950 4720,200 200,200

## Keep-outs
Keep-Out Layer:
  lines w10: 137.8,137.8 4783.46,137.8 4783.46,3011.81 137.8,3011.81 137.8,137.8
  lines w39.37: 3553.15,885.83 3553.15,1082.68 ; 3927.17,885.83 3927.17,1082.68
  text "InSide" at 5000,200 h120

## Other copper
Top Layer:
  rectangle net V3.3: 930,290 1610,500
  rectangle net NetJ2_2: 3040,2520 3080,2620
  rectangle net NetJ2_2: 3020,2539.84 3050,2620
  region net GND: 3000,2480 2750,2480 2750,2530 2800,2530 2810,2520 2840,2520 2850,2530 2850,2650 2930,2650 2930,2590 3000,2590
  region net GND: 2390,2370 2390,2280 2490,2280 2490,2370
  region net GND: 3160,2380 3160,2560 3400,2560 3400,2430 3460,2430 3460,2620 3350,2620 3350,2700 3410,2700 3410,2780 3350,2780 3350,2840 3290,2840 3290,2980 3480,2980 3480,2240 2730,2240 2730,2280 2760,2280 2760,2380
  region net V3.3: 2540,1550 2540,1230 2860,1230 2860,1330 2840,1330 2820,1350 2820,1370 2840,1390 2860,1390 2860,1550 2760,1550 2760,1510 2750,1500 2660,1500 2650,1510 2650,1550
  region net NetJ2_2: 2600,2980 3270,2980 3270,2850 3240,2820 3090,2820 3080,2800 3080,2780 2940,2780 2940,2810 2910,2810 2850,2870 2730,2870 2710,2850 2710,2780 2600,2780
Bottom Layer:
  region net V3.3: 2770,1550 2770,1460 2860,1460 2860,1550

## Silkscreen, mask and mechanical layers (free items; w line width, h text height)
Top Overlay:
  circle w10: c3740.16,984.25 r314.96
  lines w10: 0,0 0,3149.61 4921.26,3149.61 4921.26,0 0,0
  text "OutSide" at 5000,10 h120
Top Paste:
  lines w20: 540,2420 540,2500 ; 540,2550 540,2590 595,2645 ; 640,2690 690,2740 750,2740 ; 850,2740 970,2740 ; 1050,2740 1180,2740 ; 1250,2740 1370,2740 ; 1440,2740 1570,2740 ; 1630,2740 1710,2740 ; 1790,2740 1890,2740 ; 1940,2740 2030,2740 ; 2080,2740 2180,2740 ; 2230,2740 2320,2740 ; 2370,2740 2440,2740 ; 2500,2740 2580,2740 ; 2620,2900 2640,2880 ; 2630,2820 2630,2870 2640,2880 ; 2630,2950 2685,2895 ; 2660,2740 2730,2740 ; 2670,2820 2670,2880 ; 2700,2960 2700,2910 ; 2740,2910 2740,2960 ; 2780,2740 2830,2740 ; 2780,2910 2780,2960 ; 2820,2910 2820,2960 ; 2860,2910 2860,2960 ; 2900,2890 2900,2960 ; 2940,2870 2940,2960 ; 2950,2840 3070,2840 ; 2980,2870 2980,2960 ; 3020,2870 3020,2960 ; 3060,2870 3060,2960 ; 3100,2960 3100,2870 ; 3180,2870 3240,2930 ; 3190,2960 3100,2870 ; 3240,2870 3150,2870 3100,2870 ; 2640,2880 2670,2880 ; 2670,2880 2700,2910 ; 2700,2910 2880,2910 2920,2870 3100,2870
  text "EDAL" at 3550,420 h180
Top Solder:
  lines w20: 540,2420 540,2500 ; 540,2550 540,2590 600,2650 ; 640,2690 690,2740 750,2740 ; 850,2740 970,2740 ; 1050,2740 1180,2740 ; 1250,2740 1370,2740 ; 1440,2740 1570,2740 ; 1630,2740 1710,2740 ; 1790,2740 1890,2740 ; 1940,2740 2030,2740 ; 2080,2740 2180,2740 ; 2230,2740 2320,2740 ; 2370,2740 2440,2740 ; 2500,2740 2580,2740 ; 2620,2900 2640,2880 ; 2630,2820 2630,2870 2640,2880 ; 2630,2950 2685,2895 ; 2660,2740 2730,2740 ; 2670,2820 2670,2880 ; 2700,2960 2700,2910 ; 2740,2910 2740,2960 ; 2780,2740 2830,2740 ; 2780,2910 2780,2960 ; 2820,2910 2820,2960 ; 2860,2910 2860,2960 ; 2900,2890 2900,2960 ; 2940,2870 2940,2960 ; 2950,2840 3070,2840 ; 2980,2870 2980,2960 ; 3020,2870 3020,2960 ; 3060,2870 3060,2960 ; 3100,2960 3100,2870 3190,2960 ; 3190,2870 3190,2880 3240,2930 ; 3240,2870 2920,2870 2880,2910 2700,2910 ; 2640,2880 2670,2880 ; 2670,2880 2700,2910
  text "EDAL" at 3550,420 h180

## Text inside footprints (layer, text, board x,y; h text height)
P2: Top Overlay "2" at 4433.39,774.8 h36 r90; Top Overlay "1" at 4533.39,774.8 h36 r90; Top Overlay "29" at 4533.39,2334.8 h36 r90; Top Overlay "30" at 4433.39,2334.8 h36 r90